# Altium PCB ЦТЕА4.324.039-1.PcbDoc (part 2 of 2)
Units mm, origin at the board's own origin, x right, y up, seen from the top; angles counter-clockwise.
Board outline 257.3 x 114.8 mm, 4 copper layers (Top Layer, Mid-Layer 1, Internal Plane 1, Bottom Layer); 126 components, 114 nets, 540 pads, 161 vias.
Unrouted connection lines stored in the file: 1.
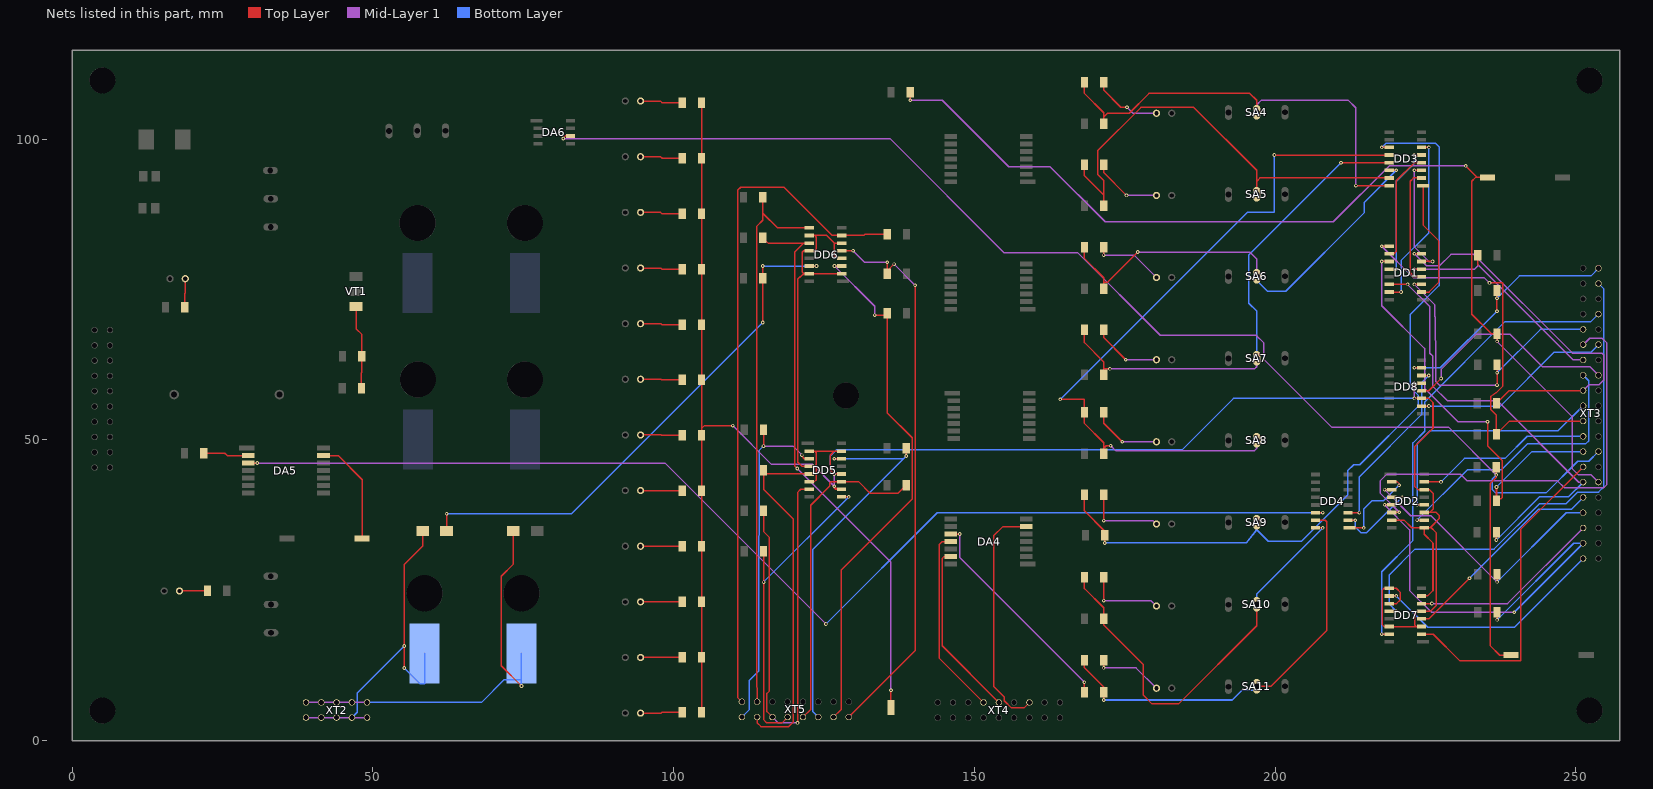
[diagram p4: the nets of this part, all layers, seen from the top]

## Via types
v1: diameter 0.6, hole 0.3, Top Layer to Bottom Layer, 161 vias

## Nets (pads, with @x,y where several pads share a name; then routed paths per layer and width w, separated by ;. In a path a pad name is that pad's centre, name@x,y a point inside that pad or via, vN(x,y) a via of type N, cw(c..) or ccw(c..) an arc to the next point about the centre after c; other vN are vias at no path point) (continued)
NetDA4_6: DA4.6 XT4.16 | length 39.2
  Top Layer w0.25: DA4.6@158.59,35.611 154.731,35.611 153.226,34.107 153.226,9.012 154.979,7.259 154.979,6.65 156.173,5.456 158.238,5.456 XT4.16@159.141,6.359
NetDA4_10: DA4.10 R29.2 | length 36.4
  Top Layer w0.25: DA4.10@146.09,34.361 v1(147.562,34.361) ; R29.2@168.292,8.069 v1(168.292,9.723)
  Mid-Layer 1 w0.25: v1(147.562,34.361) 147.562,30.453 v1(168.292,9.723)
NetDA4_11: DA4.11 XT4.13 | length 31.5
  Top Layer w0.25: DA4.11@146.09,33.111 144.662,33.111 144.133,32.583 144.133,13.747 XT4.13@151.521,6.359
NetDA4_13: DA4.13 XT4.14 | length 29.4
  Top Layer w0.25: DA4.13@146.09,30.611 144.955,30.611 144.641,30.297 144.641,15.779 XT4.14@154.061,6.359
NetDA5_2: DA5.2 R55.2 | length 7.6
  Top Layer w0.25: R55.2@21.877,47.811 25.363,47.811 25.759,47.415 DA5.2@29.264,47.415
NetDA5_3: DA5.3 DD4.14 | length 198.6
  Top Layer w0.25: DA5.3@29.264,46.165 30.74,46.165 v1(30.748,46.172) ; DD4.14@206.712,37.919 v1(207.913,37.919)
  Mid-Layer 1 w0.25: v1(30.748,46.172) 98.54,46.172 v1(125.312,19.4)
  Bottom Layer w0.25: v1(125.312,19.4) 143.83,37.919 v1(207.913,37.919)
NetDA5_13: DA5.13 VD27.2 | length 18
  Top Layer w0.25: DA5.13@41.764,47.415 44.212,47.415 48.223,43.403 48.223,33.587 VD27.2@48.205,33.587
NetDA6_6: DA6.6 R57.2 VD25.2 XT3.33 | length 239
  Top Layer w0.25: v1(81.649,100.122) 81.649,100.193 82.005,100.548 DA6.6@82.847,100.548 ; R57.2@236.784,45.497 v1(236.784,44.195) 236.784,43.751 235.751,42.718 235.751,15.819 237.36,14.21 VD25.2@239.233,14.21
  Mid-Layer 1 w0.25: v1(81.649,100.122) 135.954,100.122 154.979,81.097 167.222,81.097 180.887,67.432 196.813,67.432 198.134,66.111 198.134,63.393 209.386,52.141 228.838,52.141 v1(236.784,44.195)
  Bottom Layer w0.25: v1(236.784,44.195) 236.132,43.543 236.132,41.727 236.665,41.194 245.047,41.194 250.305,46.451 252.148,46.451 XT3.33@253.764,48.067
NetDD1_2: DD1.2 DD3.1 | length 20.7
  Top Layer w0.25: DD1.2@224.351,74.606 225.602,74.606 227.244,76.248 227.244,83.101 224.6,85.745 224.6,92.3 DD3.1@224.576,92.3
NetDD1_3: DD1.3 R6.2 XT3.5 | length 49.9
  Top Layer w0.25: v1(223.153,75.876) DD1.3@224.351,75.876 ; v1(236.894,59.126) 236.906,59.138 v1(236.906,61.179) R6.2@236.906,62.481
  Mid-Layer 1 w0.25: v1(223.153,75.876) 226.582,72.447 226.735,64.603 226.735,59.683 227.293,59.126 v1(236.894,59.126)
  Bottom Layer w0.25: v1(236.906,61.179) 244.113,68.387 XT3.5@251.224,68.387
NetDD1_4: DD1.4 DD3.2 | length 19.5
  Top Layer w0.25: DD1.4@224.351,77.146 223.116,77.146 222.467,77.795 222.467,93.035 223.002,93.57 DD3.2@224.351,93.57
NetDD1_5: DD1.5 R7.2 XT3.7 | length 37.7
  Top Layer w0.25: v1(223.153,78.405) 223.163,78.416 DD1.5@224.351,78.416 ; R7.2@233.707,80.678 233.707,79.169 233.81,79.066
  Mid-Layer 1 w0.25: v1(223.153,78.405) 233.148,78.405 233.81,79.066 249.569,63.307 XT3.7@251.224,63.307
NetDD1_6: DD1.6 DD3.3 | length 19.8
  Top Layer w0.25: v1(223.153,94.838) 223.154,94.84 DD3.3@224.351,94.84 ; DD1.6@224.351,79.686 226.178,79.686 v1(226.187,79.677)
  Mid-Layer 1 w0.25: v1(223.153,94.838) 223.153,82.099 225.574,79.677 v1(226.187,79.677)
NetDD1_7: DD1.7 R8.2 XT3.9 | length 64.8
  Top Layer w0.25: v1(223.153,80.956) DD1.7@224.351,80.956 ; R8.2@236.817,56.119 238.925,58.227 XT3.9@251.224,58.227
  Mid-Layer 1 w0.25: v1(223.153,80.956) 225.119,78.989 227.369,78.989 229.223,80.843 233.033,80.843 249.429,64.447 254.306,64.447 254.674,64.079 254.674,60.015 253.81,59.151 252.148,59.151 XT3.9@251.224,58.227
NetDD1_9: DD1.9 R9.2 XT3.11 | length 65.7
  Top Layer w0.25: v1(217.742,82.215) 217.753,82.226 DD1.9@218.951,82.226 ; v1(235.649,76.119) 237.885,76.119 237.885,58.999 236.716,57.831 235.827,57.221 235.827,55.095 236.8,54.122 R9.2@236.8,50.98 238.968,53.147 XT3.11@251.224,53.147
  Mid-Layer 1 w0.25: v1(217.742,82.215) 223,76.957 234.811,76.957 v1(235.649,76.119)
NetDD1_10: DD1.10 DD3.4 | length 18.6
  Top Layer w0.25: DD1.10@218.951,80.956 219.76,80.956 220.155,81.351 220.155,93.113 223.153,96.11 DD3.4@224.351,96.11
NetDD1_11: DD1.11 R10.2 XT3.13 | length 71.8
  Top Layer w0.25: v1(217.742,79.686) DD1.11@218.951,79.686 ; v1(235.319,53.03) 235.319,49.042 237.783,46.578 237.783,40.457 237.529,40.203 R10.2@236.81,40.203 ; R10.2@236.81,39.921 R10.2@236.81,40.203 ; v1(236.81,42.184) R10.2@236.81,40.203
  Mid-Layer 1 w0.25: v1(217.742,79.686) 217.742,72.334 224.854,65.222 224.854,58.593 230.417,53.03 v1(235.319,53.03)
  Bottom Layer w0.25: v1(236.81,42.184) 242.693,48.067 XT3.13@251.224,48.067
NetDD1_12: DD1.12 DD3.5 | length 22.6
  Top Layer w0.25: DD1.12@218.951,78.416 220.145,78.416 v1(220.155,78.405) ; v1(223.153,97.38) DD3.5@224.351,97.38
  Bottom Layer w0.25: v1(220.155,78.405) 220.155,93.011 223.153,96.008 v1(223.153,97.38)
NetDD1_14: DD1.14 R11.2 XT3.15 | length 73.1
  Top Layer w0.25: DD1.14@218.951,75.876 v1(222.035,75.876) ; v1(236.787,33.365) R11.2@236.787,34.667
  Mid-Layer 1 w0.25: v1(222.035,75.876) 225.718,72.193 225.718,64.437 226.235,63.92 226.235,58.913 228.639,56.51 236.97,56.51 250.493,42.987 XT3.15@251.224,42.987
  Bottom Layer w0.25: v1(236.787,33.365) 243.98,40.559 248.795,40.559 XT3.15@251.224,42.987
NetDD1_15: DD1.15 DD3.6 | length 29.2
  Top Layer w0.25: DD1.15@218.951,74.606 v1(220.943,74.606) ; DD3.6@224.351,98.65 225.564,98.65 v1(225.566,98.648)
  Bottom Layer w0.25: v1(220.943,74.606) 220.943,79.852 225.566,84.475 v1(225.566,98.648)
NetDD2_2: DD2.2 DD4.1 | length 14.6
  Top Layer w0.25: DD4.1@212.337,35.379 v1(214.745,35.379) ; DD2.2@219.401,43.027 220.329,43.027 220.613,42.743 v1(220.613,42.489)
  Bottom Layer w0.25: v1(214.745,35.379) 214.745,38.527 216.117,39.898 218.022,39.898 v1(220.613,42.489)
NetDD2_3: DD2.3 R12.2 XT3.17 | length 46.6
  Top Layer w0.25: v1(218.2,41.757) DD2.3@219.401,41.757 ; v1(236.909,26.41) R12.2@236.909,27.712
  Mid-Layer 1 w0.25: v1(218.2,41.757) 222.547,37.409 225.911,37.409 v1(236.909,26.41)
  Bottom Layer w0.25: v1(236.909,26.41) 248.406,37.907 XT3.17@251.224,37.907
NetDD2_4: DD2.4 DD4.2 | length 14.7
  Top Layer w0.25: DD4.2@212.112,36.649 213.321,36.649 v1(213.323,36.647) ; DD2.4@219.401,40.487 v1(221.121,40.487)
  Bottom Layer w0.25: v1(213.323,36.647) 213.323,35.525 214.233,34.615 215.249,34.615 v1(221.121,40.487)
NetDD2_5: DD2.5 R13.2 XT3.19 | length 73.2
  Top Layer w0.25: v1(218.2,39.217) DD2.5@219.401,39.217 ; v1(236.909,20.086) R13.2@236.909,21.377
  Mid-Layer 1 w0.25: v1(218.2,39.217) 222.365,35.051 222.365,24.988 225.997,21.356 v1(239.753,21.356)
  Bottom Layer w0.25: v1(236.909,20.086) 249.65,32.827 XT3.19@251.224,32.827 v1(239.753,21.356)
NetDD2_6: DD2.6 XT3.6 | length 75.3
  Top Layer w0.25: DD2.6@219.401,37.947 220.609,37.947 v1(220.647,37.985)
  Mid-Layer 1 w0.25: v1(220.647,37.985) 217.514,41.117 217.514,43.251 218.53,44.267 230.874,44.267 231.941,43.2 246.943,43.2 248.061,42.083 254.674,42.083 255.182,42.591 255.182,66.111 254.369,66.924 252.301,66.924 XT3.6@251.224,65.847
NetDD2_10: DD2.10 XT3.8 | length 46.5
  Top Layer w0.25: v1(223.61,36.677) DD2.10@224.801,36.677
  Bottom Layer w0.25: v1(223.61,36.677) 231.962,45.029 237.605,45.029 241.923,49.347 251.626,49.347 252.134,49.855 252.134,59.857 XT3.8@251.224,60.767
NetDD2_12: DD2.12 XT3.10 | length 41.6
  Top Layer w0.25: v1(223.61,39.212) 223.614,39.217 DD2.12@224.801,39.217
  Bottom Layer w0.25: v1(223.61,39.212) 223.61,49.372 225.794,51.557 247.094,51.557 XT3.10@251.224,55.687
NetDD2_15: DD2.15 XT3.12 | length 29.6
  Top Layer w0.25: DD2.15@224.801,43.027 v1(227.576,43.027)
  Bottom Layer w0.25: v1(227.576,43.027) 231.484,46.934 238.24,46.934 241.913,50.607 XT3.12@251.224,50.607
NetDD3_11: DD3.11 R24.1 R25.1 SA9.2 | length 133.3
  Top Layer w0.25: R24.1@168.292,40.868 168.292,38.218 171.673,34.838 R25.1@171.673,34.18 v1(171.673,32.878) ; v1(217.742,98.648) 217.744,98.65 DD3.11@218.951,98.65
  Bottom Layer w0.25: v1(171.673,32.878) 195.198,32.878 196.935,35.077 ; SA9.2@196.935,36.316 196.935,35.077 ; v1(217.742,98.648) 218.428,99.334 226.683,99.334 227.267,98.75 227.267,75.687 222.467,70.886 222.467,58.77 223.838,57.399 223.838,55.646 214.085,45.893 213.069,45.893 212.053,44.877 212.053,40.813 204.407,33.167 198.845,33.167 196.935,35.077
NetDD3_12: DD3.12 R22.1 R23.1 SA8.2 | length 118.9
  Top Layer w0.25: v1(164.29,56.753) 168.292,56.753 R22.1@168.292,54.593 168.292,52.751 171.492,49.551 171.492,48.617 ; R23.1@171.492,47.73 171.492,48.617 ; v1(172.654,49.046) 171.921,49.046 171.492,48.617 ; v1(199.886,97.38) DD3.12@218.951,97.38
  Mid-Layer 1 w0.25: v1(172.654,49.046) 173.47,48.229 196.579,48.229 196.935,48.585 SA8.2@196.935,49.953
  Bottom Layer w0.25: v1(164.29,56.753) 195.365,87.828 199.886,87.828 v1(199.886,97.38)
NetDD3_13: DD3.13 R20.1 R21.1 SA7.2 | length 83.2
  Top Layer w0.25: R20.1@168.292,68.319 168.292,66.187 171.492,62.987 171.492,61.825 ; R21.1@171.492,60.876 171.492,61.825 ; v1(172.523,61.825) 171.492,61.825 ; v1(210.962,96.11) DD3.13@218.951,96.11
  Mid-Layer 1 w0.25: v1(172.523,61.825) 196.596,61.825 196.935,62.165 SA7.2@196.935,63.59
  Bottom Layer w0.25: SA7.2@196.935,63.59 196.935,71.424 195.619,72.74 195.619,80.767 v1(210.962,96.11)
NetDD3_14: DD3.14 R18.1 R19.1 SA6.2 | length 74.3
  Top Layer w0.25: R18.1@168.292,82.045 168.292,80.182 171.492,76.982 171.492,76.195 ; R19.1@171.492,75.132 171.492,76.195 ; v1(177.153,81.249) 172.099,76.195 171.492,76.195 ; DD3.14@218.951,94.84 v1(220.155,94.84)
  Mid-Layer 1 w0.25: v1(177.153,81.249) 195.797,81.249 196.935,80.111 SA6.2@196.935,77.227
  Bottom Layer w0.25: SA6.2@196.935,77.227 196.935,76.53 198.718,74.747 201.766,74.747 214.847,87.828 214.847,89.531 v1(220.155,94.84)
NetDD3_15: DD3.15 R16.1 R17.1 SA5.2 | length 75.9
  Top Layer w0.25: R16.1@168.292,95.772 168.292,93.949 171.492,90.749 ; R17.1@171.492,88.974 171.492,90.749 ; SA5.2@196.935,90.864 196.935,93.035 ; DD3.15@218.951,93.57 197.47,93.57 196.935,93.035 ; 171.492,90.749 171.492,93.159 170.498,94.153 170.498,98.115 177.687,105.303 186.475,105.303 196.935,94.843 196.935,93.035
NetDD3_16: DD3.16 R14.1 R15.1 SA4.2 | length 74.8
  Top Layer w0.25: R14.1@168.292,109.498 168.292,107.614 171.492,104.414 171.492,103.703 ; R15.1@171.492,102.551 171.492,103.703 ; SA4.2@196.935,104.501 196.935,106.476 195.797,107.615 179.007,107.615 175.731,104.338 172.127,104.338 171.492,103.703 ; v1(213.424,92.3) DD3.16@218.951,92.3
  Mid-Layer 1 w0.25: SA4.2@196.935,104.501 196.935,105.735 197.722,106.522 212.129,106.522 213.424,105.227 v1(213.424,92.3)
NetDD4_3: DD4.3 DD8.6 | length 30.7
  Top Layer w0.25: DD4.3@212.112,37.919 v1(214.009,37.919) ; DD8.6@224.351,60.721 225.555,60.721 v1(225.56,60.726)
  Bottom Layer w0.25: v1(214.009,37.919) 214.009,43.886 224.346,54.224 224.346,59.512 v1(225.56,60.726)
NetDD4_15: DD4.15 R28.1 R29.1 SA11.2 | length 70.3
  Top Layer w0.25: R28.1@168.292,13.414 168.292,12.115 171.492,8.915 R29.1@171.492,8.069 v1(171.492,6.767) ; SA11.2@196.935,9.041 196.935,9.037 199.302,9.037 208.598,18.334 208.598,36.395 208.344,36.649 DD4.15@206.712,36.649
  Bottom Layer w0.25: v1(171.492,6.767) 192.867,6.767 194.501,8.402 196.935,8.402 SA11.2@196.935,9.041
NetDD4_16: DD4.16 R26.1 R27.1 SA10.2 | length 70.5
  Top Layer w0.25: R26.1@168.292,27.14 168.292,25.293 171.492,22.093 R27.1@171.492,20.277 171.492,19.245 178.093,12.644 178.093,7.564 179.541,6.116 183.935,6.116 196.935,19.116 SA10.2@196.935,22.678 ; DD4.16@206.712,35.379 v1(207.913,35.379)
  Bottom Layer w0.25: SA10.2@196.935,22.678 196.935,24.401 v1(207.913,35.379)
NetDD6_11: DD6.11 R48.2 П7.1 | length 92.6
  Top Layer w0.25: R48.2@114.816,83.622 115.703,82.735 121.629,82.735 ; v1(120.537,45.258) 120.13,45.664 120.13,81.236 121.629,82.735 ; DD6.11@122.54,82.735 121.629,82.735 ; П7.1@136.126,5.504 v1(136.126,8.383)
  Mid-Layer 1 w0.25: v1(120.537,45.258) 136.126,29.668 v1(136.126,8.383)
NetDD6_14: DD6.14 R49.2 VD19.1 | length 88.1
  Top Layer w0.25: VD19.1@62.235,34.867 v1(62.235,37.73) ; v1(114.816,69.54) R49.2@114.816,76.856 v1(114.816,78.925) ; DD6.14@122.54,78.925 v1(123.737,78.925)
  Bottom Layer w0.25: v1(62.235,37.73) 83.006,37.73 v1(114.816,69.54) ; v1(114.816,78.925) v1(123.737,78.925)
NetDD7_2: DD7.2 XT3.14 | length 54.8
  Top Layer w0.25: DD7.2@224.351,17.712 226.277,17.712 230.659,13.33 240.882,13.33 240.882,35.185 XT3.14@251.224,45.527
NetDD7_4: DD7.4 XT3.16 | length 35.2
  Top Layer w0.25: DD7.4@224.351,20.252 225.554,20.252 v1(232.322,27.02)
  Bottom Layer w0.25: v1(232.322,27.02) 243.803,38.501 249.278,38.501 XT3.16@251.224,40.447
NetDD7_6: DD7.6 XT3.18 | length 32.1
  Top Layer w0.25: DD7.6@224.351,22.792 226.062,22.792 v1(226.074,22.804)
  Mid-Layer 1 w0.25: v1(226.074,22.804) 238.661,22.804 XT3.18@251.224,35.367
NetDD7_10: DD7.10 XT3.20 | length 39.2
  Top Layer w0.25: DD7.10@218.951,24.062 220.143,24.062 v1(220.155,24.074)
  Bottom Layer w0.25: v1(220.155,24.074) 225.362,18.867 239.804,18.867 XT3.20@251.224,30.287
NetDD7_12: DD7.12 XT3.22 | length 83.7
  Top Layer w0.25: DD7.12@218.951,21.522 220.143,21.522 v1(220.155,21.534)
  Bottom Layer w0.25: v1(220.155,21.534) 218.962,22.728 218.962,27.554 223.28,31.872 236.411,31.872 243.904,39.365 248.323,39.365 250.305,41.347 253.786,41.347 254.674,42.235 254.674,75.097 XT3.22@253.764,76.007
NetDD7_15: DD7.15 XT3.24 | length 77.7
  Top Layer w0.25: v1(217.742,17.724) 217.754,17.712 DD7.15@218.951,17.712
  Bottom Layer w0.25: v1(217.742,17.724) 217.742,28.087 222.924,33.269 222.924,49.499 224.88,51.455 224.88,56.332 238.226,69.678 252.515,69.678 XT3.24@253.764,70.927
NetDD8_2: DD8.2 XT3.26 | length 33.6
  Top Layer w0.25: DD8.2@224.351,55.641 225.56,55.641 v1(225.566,55.646)
  Bottom Layer w0.25: v1(225.566,55.646) 237.453,55.646 246.394,64.587 252.504,64.587 XT3.26@253.764,65.847
NetDD8_4: DD8.4 XT3.28 | length 37
  Top Layer w0.25: DD8.4@224.351,58.181 225.56,58.181 v1(227.598,60.218)
  Mid-Layer 1 w0.25: v1(227.598,60.218) 227.598,61.742 233.465,67.61 239.002,67.61 244.438,62.174 252.357,62.174 XT3.28@253.764,60.767
NetDD8_7: DD8.7 R54.1 XT3.21 | length 41.2
  Top Layer w0.25: v1(223.153,61.996) 223.158,61.991 DD8.7@224.351,61.991 ; R54.1@236.889,74.857 v1(236.889,73.555) 236.889,71.425 v1(236.894,71.42)
  Bottom Layer w0.25: v1(223.153,61.996) 227.471,61.996 v1(236.894,71.42) ; v1(236.889,73.555) 240.621,77.287 252.504,77.287 XT3.21@253.764,78.547
NETLABEL7: DD2.7 DD2.9 DD2.11 DD2.14 DD5.2 DD5.4 DD5.6 DD5.10 DD5.12 DD5.15 DD6.2 DD6.4 DD6.6 DD6.10 DD6.12 DD6.15 DD7.3 DD7.5 DD7.7 DD7.9 DD7.11 DD7.14 DD8.3 DD8.5 R38.1 R39.1 R40.1 R41.1 R42.1 R43.1 R44.1 R45.1 R50.1 R51.1 R52.1 R53.1 | length 408.7
  Top Layer w0.25: R53.1@104.628,4.695 R52.1@104.628,13.909 R51.1@104.628,23.123 104.628,27.706 R50.1@104.628,32.337 104.628,36.926 R45.1@104.628,41.552 R44.1@104.628,50.766 104.628,51.887 ; R38.1@104.628,106.051 R39.1@104.628,96.837 R40.1@104.628,87.623 R41.1@104.628,78.409 R42.1@104.628,69.194 R43.1@104.628,59.98 104.628,51.887 ; v1(109.818,52.395) 105.136,52.395 104.628,51.887 ; DD5.6@122.514,43.079 123.407,43.079 123.686,43.358 123.686,45.34 123.407,45.619 ; DD5.2@122.514,48.159 123.407,48.159 ; DD6.10@122.54,84.005 123.407,84.005 ; v1(126.709,42.311) v1@126.709,42.063 ; DD5.12@127.914,44.349 v1(126.709,44.349) 126.023,45.035 126.023,47.473 126.709,48.159 ; DD5.15@127.914,48.159 126.709,48.159 ; DD6.2@127.94,77.655 DD6.15@122.54,77.655 121.629,77.655 ; DD6.4@127.94,80.195 126.697,80.461 126.709,82.735 ; DD6.6@127.94,82.735 126.709,82.735 ; DD7.11@218.951,22.792 220.194,22.792 220.841,23.439 220.841,24.646 220.155,25.332 DD7.9@218.951,25.332 218.149,25.332 217.793,24.976 217.793,19.312 218.123,18.982 DD7.14@218.951,18.982 223.483,18.982 ; DD2.7@219.401,36.677 221.451,36.677 222.721,35.407 DD2.9@224.801,35.407 ; v1(223.158,56.911) DD8.3@224.351,56.911 225.566,56.911 226.251,56.225 226.251,51.963 223.178,48.89 223.178,42.315 223.737,41.757 DD2.14@224.801,41.757 225.642,41.757 226.277,41.122 226.277,38.531 225.693,37.947 ; v1(223.158,59.451) DD8.5@224.351,59.451 ; DD7.3@224.351,18.982 223.483,18.982 ; DD7.7@224.351,24.062 225.35,24.062 226.251,24.963 226.251,32.862 224.801,34.313 DD2.9@224.801,35.407 ; DD2.11@224.801,37.947 225.693,37.947 ; 121.629,77.655 120.638,76.779 120.638,46.299 121.318,45.619 DD5.4@122.514,45.619 123.407,45.619 ; 121.629,77.655 121.375,77.909 121.375,81.211 121.629,81.465 DD6.12@122.54,81.465 123.407,81.465 123.712,81.769 123.712,83.7 123.407,84.005 ; 123.407,45.619 123.686,45.898 123.686,47.88 123.407,48.159 ; 123.407,48.159 126.709,48.159 ; 123.407,84.005 125.439,84.005 126.709,82.735 ; v1@126.709,42.063 DD5.10@127.914,41.809 126.963,41.809 v1@126.709,42.063 ; 223.483,18.982 223.178,19.287 223.178,21.217 223.483,21.522 DD7.5@224.351,21.522 225.858,21.522 226.759,22.423 226.759,34.615 225.868,35.506 ; DD2.9@224.801,35.407 225.868,35.506 ; DD2.9@224.801,35.407 225.769,35.407 225.868,35.506 ; 225.693,37.947 226.785,37.947 227.293,37.439 227.293,36.931 225.868,35.506
  Mid-Layer 1 w0.25: v1(109.818,52.395) 116.275,45.938 123.082,45.938 v1(126.709,42.311) v1(126.709,44.349) ; v1(223.158,56.911) v1(223.158,59.451)
  Bottom Layer w0.25: v1(126.709,44.349) 126.023,45.035 126.023,47.315 127.064,48.356 184.519,48.356 193.074,56.911 v1(223.158,56.911)
NetR1_2: R1.2 R5.1 VT1.1 | length 14
  Top Layer w0.25: VT1.1@47.198,72.21 47.198,68.511 48.151,67.559 R1.2@48.151,63.893 48.151,61.27 48.09,61.209 R5.1@48.09,58.618
NetR2_2: R2.2 VD1.1 | length 4.7
  Top Layer w0.25: VD1.1@17.826,24.9 20.13,24.9 20.136,24.894 R2.2@22.481,24.894
NetR4_2: R4.2 VD2.1 | length 4.8
  Top Layer w0.25: R4.2@18.703,72.04 18.703,74.366 18.788,74.452 VD2.1@18.788,76.813
NetR14_2: R14.2 VD3.2 | length 11.7
  Top Layer w0.25: R14.2@171.492,109.498 171.492,108.199 174.35,105.342 v1(175.366,105.342)
  Mid-Layer 1 w0.25: v1(175.366,105.342) 176.382,104.326 VD3.2@180.266,104.326
NetR16_2: R16.2 VD4.2 | length 11.7
  Top Layer w0.25: R16.2@171.492,95.772 171.492,94.457 v1(175.281,90.668)
  Mid-Layer 1 w0.25: v1(175.281,90.668) VD4.2@180.266,90.668
NetR18_2: R18.2 VD5.2 | length 11.6
  Top Layer w0.25: v1(171.489,80.741) 171.492,80.745 R18.2@171.492,82.045
  Mid-Layer 1 w0.25: v1(171.489,80.741) 176.536,80.741 VD5.2@180.266,77.011
NetR20_2: R20.2 VD6.2 | length 11.6
  Top Layer w0.25: R20.2@171.492,68.319 171.492,67.025 v1(175.164,63.354)
  Mid-Layer 1 w0.25: v1(175.164,63.354) VD6.2@180.266,63.354
NetR22_2: R22.2 VD7.2 | length 11.9
  Top Layer w0.25: R22.2@171.492,54.593 171.492,52.776 v1(174.571,49.697)
  Mid-Layer 1 w0.25: v1(174.571,49.697) VD7.2@180.266,49.697
NetR24_2: R24.2 VD8.2 | length 13.3
  Top Layer w0.25: v1(171.492,36.596) R24.2@171.492,40.868
  Mid-Layer 1 w0.25: v1(171.492,36.596) 179.71,36.596 VD8.2@180.266,36.04
NetR26_2: R26.2 VD9.2 | length 13
  Top Layer w0.25: v1(171.492,23.287) R26.2@171.492,27.14
  Mid-Layer 1 w0.25: v1(171.492,23.287) 179.362,23.287 VD9.2@180.266,22.383
NetR28_2: R28.2 VD10.2 | length 11.5
  Top Layer w0.25: v1(171.489,12.111) 171.492,12.114 R28.2@171.492,13.414
  Mid-Layer 1 w0.25: v1(171.489,12.111) 176.881,12.111 VD10.2@180.266,8.726
NetR38_2: R38.2 VD11.1 | length 7.1
  Top Layer w0.25: VD11.1@94.499,106.35 97.804,106.35 98.102,106.051 R38.2@101.428,106.051
NetR39_2: R39.2 VD12.1 | length 7
  Top Layer w0.25: VD12.1@94.499,97.098 97.829,97.098 98.09,96.837 R39.2@101.428,96.837
NetR40_2: R40.2 VD13.1 | length 7
  Top Layer w0.25: VD13.1@94.499,87.847 97.829,87.847 98.053,87.623 R40.2@101.428,87.623
NetR41_2: R41.2 VD14.1 | length 7
  Top Layer w0.25: VD14.1@94.499,78.595 97.854,78.595 98.041,78.409 R41.2@101.428,78.409
NetR42_2: R42.2 VD15.1 | length 7
  Top Layer w0.25: VD15.1@94.499,69.344 97.88,69.344 98.029,69.194 R42.2@101.428,69.194
NetR43_2: R43.2 VD16.1 | length 7
  Top Layer w0.25: VD16.1@94.499,60.092 97.905,60.092 98.017,59.98 R43.2@101.428,59.98
NetR44_2: R44.2 VD17.1 | length 7
  Top Layer w0.25: VD17.1@94.499,50.841 97.905,50.841 97.98,50.766 R44.2@101.428,50.766
NetR45_2: R45.2 VD18.1 | length 6.9
  Top Layer w0.25: VD18.1@94.499,41.589 97.931,41.589 97.968,41.552 R45.2@101.428,41.552
NetR50_2: R50.2 VD21.1 | length 6.9
  Top Layer w0.25: VD21.1@94.499,32.338 97.956,32.338 R50.2@101.428,32.337
NetR51_2: R51.2 VD22.1 | length 6.9
  Top Layer w0.25: VD22.1@94.499,23.086 97.931,23.086 97.968,23.123 R51.2@101.428,23.123
NetR52_2: R52.2 VD23.1 | length 7
  Top Layer w0.25: VD23.1@94.499,13.835 97.905,13.835 97.98,13.909 R52.2@101.428,13.909
NetR53_2: R53.2 VD24.1 | length 7
  Top Layer w0.25: VD24.1@94.499,4.583 97.905,4.583 98.017,4.695 R53.2@101.428,4.695
NetR56_2: R56.2 R58.1 VD26.2 XT3.35 | length 172
  Top Layer w0.25: v1(139.347,106.497) R56.2@139.347,107.795 ; v1(231.712,95.575) 233.625,93.663 ; VD26.2@235.294,93.663 233.625,93.663 ; v1(236.909,66.39) R58.1@236.909,67.686 ; R58.1@236.909,67.701 R58.1@236.909,67.686 ; 233.625,93.663 233.331,93.663 232.703,93.035 232.703,70.912 235.929,67.686 R58.1@236.909,67.686
  Mid-Layer 1 w0.25: v1(139.347,106.497) 144.667,106.497 155.716,95.448 162.574,95.448 171.743,86.279 209.665,86.279 218.962,95.575 v1(231.712,95.575) ; v1(236.909,66.39) 249.381,53.919 249.381,45.283 250.464,44.2 252.551,44.2 XT3.35@253.764,42.987
КПС-1: VD19.2 XT2.1 XT2.2 XT2.3 XT2.4 XT2.5 П5.1 | length 59.2
  Top Layer w0.25: v1(55.208,12.09) v1(55.208,15.743) 55.208,29.278 58.285,32.354 VD19.2@58.285,34.867
  Mid-Layer 1 w0.25: XT2.1@38.862,3.829 XT2.2@41.402,3.829 XT2.3@43.942,3.829 XT2.4@46.482,3.829 XT2.5@49.022,3.829
  Bottom Layer w0.25: XT2.4@46.482,3.829 47.385,4.731 47.385,7.92 v1(55.208,15.743) ; v1(55.208,12.09) 57.829,9.469 58.591,9.469 П5.1@58.591,14.51
КПС-2: VD20.1 XT2.6 XT2.7 XT2.8 XT2.9 XT2.10 П6.1 | length 70.8
  Top Layer w0.25: VD20.1@73.342,34.867 73.342,29.361 71.311,27.331 71.311,12.471 v1(74.69,9.093)
  Mid-Layer 1 w0.25: XT2.6@38.862,6.369 XT2.7@41.402,6.369 XT2.8@43.942,6.369 XT2.9@46.482,6.369 XT2.10@49.022,6.369
  Bottom Layer w0.25: XT2.10@49.022,6.369 68.033,6.369 71.819,10.155 П6.1@74.694,10.155 ; v1(74.69,9.093) 74.694,9.098 П6.1@74.694,10.155 ; П6.1@74.694,14.51 П6.1@74.694,10.155
ТМ1: DD5.3 R30.2 XT5.1 | length 57.8
  Top Layer w0.25: v1(114.938,48.991) R30.2@114.938,51.692 ; v1(121.324,47.493) 121.629,46.889 DD5.3@122.514,46.889
  Mid-Layer 1 w0.25: v1(114.938,48.991) 119.825,48.991 v1(121.324,47.493)
  Bottom Layer w0.25: XT5.1@111.335,3.928 112.586,5.179 112.586,10.053 114.161,11.628 114.161,19.934 114.263,48.316 v1(114.938,48.991)
ТМ2: DD5.5 R31.2 XT5.2 | length 59.2
  Top Layer w0.25: XT5.2@113.875,3.928 113.875,2.999 114.517,2.357 119.114,2.357 119.876,3.119 119.876,36.865 114.938,41.803 R31.2@114.938,44.966 115.555,44.349 DD5.5@122.514,44.349
ТМ3: DD5.7 R32.2 XT5.3 | length 80.3
  Top Layer w0.25: R32.2@114.938,38.24 114.938,34.767 115.914,33.792 115.914,8.275 115.507,7.869 115.507,4.836 XT5.3@116.415,3.928 ; v1(120.587,2.967) 120.587,41.276 121.121,41.809 DD5.7@122.514,41.809
  Mid-Layer 1 w0.25: XT5.3@116.415,3.928 117.376,2.967 v1(120.587,2.967)
ТМ4: DD5.9 R33.2 XT5.4 | length 53.9
  Top Layer w0.25: R33.2@114.938,31.514 v1@114.938,26.366 ; v1(114.949,26.366) v1@114.938,26.366 ; XT5.4@118.955,3.928 117.994,2.967 115.482,2.967 114.938,3.511 v1@114.938,26.366 ; DD5.9@127.914,40.539 v1(129.122,40.539)
  Bottom Layer w0.25: v1(114.949,26.366) v1(129.122,40.539)
ТМ5: DD5.11 R34.2 XT5.5 | length 54.9
  Top Layer w0.25: XT5.5@121.495,3.928 122.772,5.205 122.772,39.142 125.926,42.297 125.926,42.805 126.201,43.079 DD5.11@127.914,43.079 130.716,43.079 132.652,41.143 137.307,41.143 R34.2@138.671,42.506
ТМ6: DD5.14 R35.2 XT5.6 | length 64.2
  Top Layer w0.25: v1(126.709,46.883) 126.715,46.889 DD5.14@127.914,46.889 ; v1(138.671,47.34) R35.2@138.671,48.626
  Bottom Layer w0.25: XT5.6@124.035,3.928 123.127,4.836 123.127,31.797 138.213,46.883 ; v1(126.709,46.883) 138.213,46.883 ; v1(138.671,47.34) 138.213,46.883
ТМ7: DD6.3 R36.2 XT5.7 | length 88.5
  Top Layer w0.25: XT5.7@126.575,3.928 127.852,5.205 127.852,28.392 139.663,40.203 139.663,50.363 135.517,54.509 R36.2@135.517,70.759 ; v1(126.734,78.925) DD6.3@127.94,78.925 ; v1(133.414,70.759) R36.2@135.517,70.759 ; R36.2@135.517,71.038 R36.2@135.517,70.759
  Mid-Layer 1 w0.25: v1(126.734,78.925) 133.414,72.244 v1(133.414,70.759)
ТМ8: DD6.5 R37.2 XT5.8 | length 93.2
  Top Layer w0.25: DD6.5@127.94,81.465 v1(129.833,81.465) ; XT5.8@129.115,3.928 140.171,14.984 140.171,71.032 140.139,71.064 v1(140.139,75.744) ; R37.2@135.517,77.639 R37.2@135.517,78.119 ; v1(135.517,79.548) R37.2@135.517,78.119 ; v1(136.64,79.243) R37.2@135.517,78.119
  Mid-Layer 1 w0.25: v1(129.833,81.465) 131.75,79.548 v1(135.517,79.548) ; v1(136.64,79.243) v1(140.139,75.744)
ТМ9: DD6.7 R46.2 XT5.9 | length 113.8
  Top Layer w0.25: XT5.9@111.335,6.468 110.631,7.172 110.631,91.511 111.139,92.019 118.364,92.019 126.379,84.005 DD6.7@127.94,84.005 131.586,84.005 131.821,84.24 R46.2@135.517,84.24
ТМ10: DD6.9 R47.2 XT5.10 | length 93.1
  Top Layer w0.25: XT5.10@113.875,6.468 113.831,11.247 113.831,85.567 114.816,86.552 114.816,87.701 ; R47.2@114.816,90.388 114.816,87.701 ; DD6.9@122.54,85.275 117.242,85.275 114.816,87.701
pads on no net: DA1.1 DA1.5 DA1.7 DA1.8 DA1.12 DA1.14 DA2.1 DA2.5 DA2.7 DA2.8 DA2.12 DA2.14 DA3.1 DA3.5 DA3.7 DA3.8 DA3.12 DA3.14 DA4.1 DA4.5 DA4.7 DA4.8 DA4.12 DA4.14 DA5.1 DA5.4 DA5.5 DA5.6 DA5.7 DA5.8 DA5.9 DA5.10 DA5.12 DA5.14 DA6.3 DA6.4 DA6.7 DD1.13 DD1.16 DD2.13 DD2.16 DD3.7 DD3.9 DD3.10 DD4.4 DD4.5 DD4.6 DD4.7 DD4.9 DD4.10 DD4.11 DD4.12 DD4.13 DD5.13 DD5.16 DD6.13 DD6.16 DD7.13 DD7.16 DD8.9 DD8.10 DD8.11 DD8.12 DD8.13 DD8.14 DD8.15 DD8.16 SA1.1 SA2.3 SA3.1 SA4.1 SA5.1 SA6.1 SA7.1 SA8.1 SA9.1 SA10.1 SA11.1 XT3.23 XT3.25 XT3.27 XT3.37 XT3.38 XT4.17 XT4.18 XT5.11 XT5.12 XT5.13 XT5.14 XT5.15 XT5.16 П1.2 П2.2 П3.2 П4.2 П5.2 П6.2
copper on no net:
  other v1: 215.118,82.648

## Polygon pours and split planes (outlines as drawn)
GND on Internal Plane 1 (split plane): 256.79,0.51 0.51,0.51 0.51,114.29 256.79,114.29

## Keep-outs
Keep-Out Layer:
  region: 126.196,59.878 131.195,59.878 131.195,54.871 126.211,54.871 126.203,54.878
  region: 249.798,7.505 254.798,7.505 254.798,2.498 249.814,2.498 249.806,2.505
  region: 249.766,112.281 254.765,112.281 254.765,107.274 249.781,107.274 249.773,107.282
  region: 2.49,112.388 7.489,112.388 7.489,107.382 2.505,107.382 2.497,107.389
  region: 2.495,7.5 7.494,7.5 7.494,2.493 2.51,2.493 2.502,2.501
  lines w0.254: 0.001,114.799 0.002,114.8 ; 257.294,0 257.3,0.006
  lines w1.2: 0,0 257.294,0 ; 0.001,0.002 0.001,114.799 ; 0.002,114.8 257.3,114.8 257.3,0.006

## Silkscreen, mask and mechanical layers (free items; w line width, h text height)
Mechanical 1:
  lines w0.5: 6.266,50.497 6.266,53.037